# EAGLE board LDR (EAGLE 9.5.2)
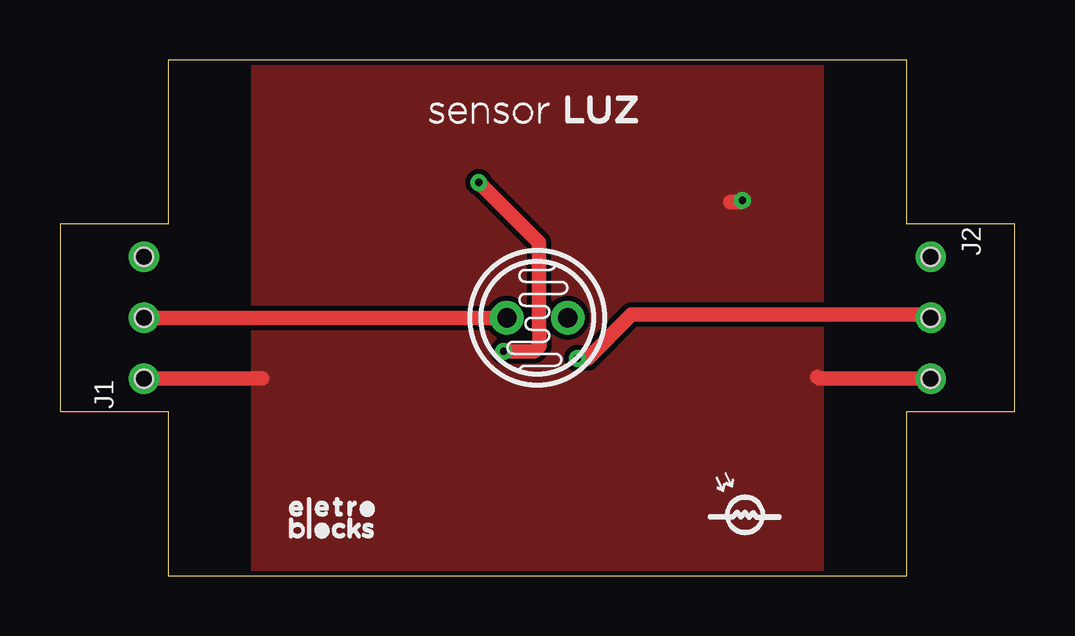
[diagram p0: board, top side]
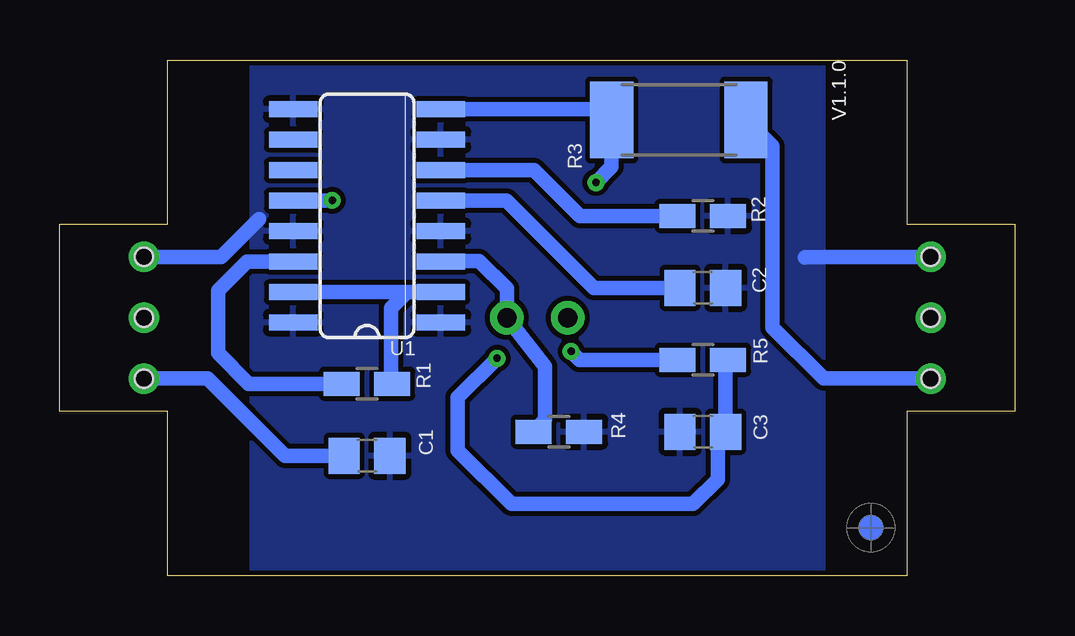
[diagram p1: board, bottom side, seen from below]

Size 39.8 x 21.5 mm. Coordinates in mm from the lower left corner, seen from the top.
Outline: 4.5,0 35.3,0 35.3,6.85 39.8,6.85 39.8,14.65 35.3,14.65 35.3,21.5 4.5,21.5 4.5,14.65 0,14.65 0,6.85 4.5,6.85 4.5,0
Copper layers (1*16): Top 0.035mm / dielectric 1.5mm / Bottom 0.035mm
Design rules "default *": minimum track width 6mil, minimum drill 0.35mm, track to track 8mil, track to pad 8mil, pad to pad 8mil, via to via 8mil, smd to smd 8mil, copper to edge 8mil, drill to drill 8mil, minimum pad ring 10mil, minimum via ring 8mil, stop-mask expansion 4mil, vias tented up to drill 3mm, thermal gap 10mil

## Footprints (pad centres in the part's own frame; a part is rotated, then mirrored left to right if it is on the bottom)
C0805 = smd 1.3 x 1.5: 1 -0.95,0; 2 0.95,0
3CONECTOR = drill 0.75: 1 0,2.54; 2 0,0; 3 0,-2.54 | hole 0.75: 0,2.54; 0,0; 0,-2.54
TO46-VT200 = drill 0.8 pad 1.4: 1 -1.27,0; 2 1.27,0
R0805W = smd 1.5 x 1: 1 -1.052,0; 2 1.052,0
R2512 = smd 1.8 x 3.2: 1 -2.8,0; 2 2.8,0
SO16 = smd 0.66 x 2.032: 1 -4.445,-3.073; 2 -3.175,-3.073; 3 -1.905,-3.073; 4 -0.635,-3.073; 5 0.635,-3.073; 6 1.905,-3.073; 7 3.175,-3.073; 8 4.445,-3.073; 9 4.445,3.073; 10 3.175,3.073; 11 1.905,3.073; 12 0.635,3.073; 13 -0.635,3.073; 14 -1.905,3.073; 15 -3.175,3.073; 16 -4.445,3.073

## Placement (x,y rotation side)
C1  100nF  [C0805]  27,5 0 bottom
C2  100nF  [C0805]  13,12 180 bottom
C3  100nF  [C0805]  13,6 0 bottom
J1  CONECTOR_MACHO  [3CONECTOR]  3.5,10.75 0 top
J2  CONECTOR_FEMEA  [3CONECTOR]  36.3,10.75 180 top
LDR  VT20N1  [TO46-VT200]  19.9,10.75 0 top
R1  4K7  [R0805W]  27,8 180 bottom
R2  3k9  [R0805W]  13,15 0 bottom
R3  470R 1W  [R2512]  14,19 0 bottom
R4  1.6M  [R0805W]  19,6 0 bottom
R5  1k  [R0805W]  13,9 0 bottom
U1  TL494BD  [SO16]  27,15 90 bottom
U$1  [FIDUCIAL_G10]  6,2 0 bottom

## Library data of the parts
C1-C3 = rcl; SPICEPREFIX: C
J1 J2 = Eletroblocks Lib
LDR = photo-elements
R1 R2 R4 R5 = rcl; SPICEPREFIX: R
R3 = eagle-ltspice; SPICEMODEL: NONE; SPICEPREFIX: R
U1 = linear
U$1 = dicons

## Nets
GND: C1.2 C2.1 C3.1 J1.1 J2.3 R2.2 R4.2 U1.1 U1.4 U1.7 U1.9 U1.13 U1.16
LDR_SIGNAL: LDR.2 R4.1 U1.3
N$2: C2.2 U1.5
N$3: R1.2 U1.14
N$4: R2.1 U1.6
PWM: R3.1 R5.1 U1.8
SIGNAL_IN: J1.2 LDR.1
SIGNAL_OUT: C3.2 J2.2 R5.2
VCC: C1.1 J1.3 J2.1 R3.2 U1.12
VREF: R1.1 U1.2 U1.15

## Tracks (layer width: path | path; a pad name or v marks a point on that pad's centre or on a via)
GND
  Bottom 0.61: J1.1 8.72,13.29 8.75,13.26 | J2.3 33.08,13.29 31.5,14.86
  pour Bottom: 8,0 31.8,0 31.8,21.5 8,21.5
LDR_SIGNAL
  Bottom 0.61: R4.1 19.57,6.48 19.57,8.72 LDR.2 21.17,11.96 22.33,13.12 23.9,13.12 U1.3
N$2
  Bottom 0.61: U1.5 21.18,15.63 17.55,12 C2.2
N$3
  Bottom 0.61: R1.2 31.93,8 33.21,9.28 33.21,11.88 32.68,12.41 31.99,13.1 U1.14
N$4
  Bottom 0.61: R2.1 18.13,15 20.03,16.91 U1.6
PWM  (via drill 0.3)
  Top 0.61: v17.46,16.39 19.96,13.89 19.96,10.25 19.98,10.23 19.98,9.57 19.77,9.35 v18.49,9.35
  Bottom 0.61: U1.8 17.24,19.45 R3.1 16.8,17.05 v17.46,16.39 | v18.49,9.35 18.14,9 R5.1
SIGNAL_IN
  Top 0.61: J1.2 LDR.1
SIGNAL_OUT  (via drill 0.3)
  Top 0.61: 36.25,10.7 J2.2 36.17,10.88 23.83,10.88 22.01,9.06 v21.58,9.06
  Bottom 0.61: R5.2 12.05,8.9 C3.2 12.37,5.68 12.37,4.02 13.41,2.99 20.98,2.99 23.22,5.23 23.22,7.42 v21.58,9.06
VCC  (via drill 0.3)
  Top 0.61: J1.3 8.42,8.21 8.43,8.21 | v28.45,15.65 28.38,15.57 27.95,15.57 | J2.1 31.65,8.21 31.58,8.29
  Bottom 0.61: J2.1 33.63,8.21 30.42,5 C1.1 | R3.2 10.1,17.9 10.1,10.35 7.96,8.21 J1.3 | U1.12 28.46,15.63 v28.45,15.65
  pour Top: 8,0 31.79,0 31.79,21.48 8.04,21.48 8.04,0.04
VREF
  Bottom 0.61: U1.15 U1.2 25.33,11.82 25.99,11.17 25.99,8.05 R1.1

## Text on the board
bPlace: V1.1.0